# Allegro board 2019-09-10-3.brd
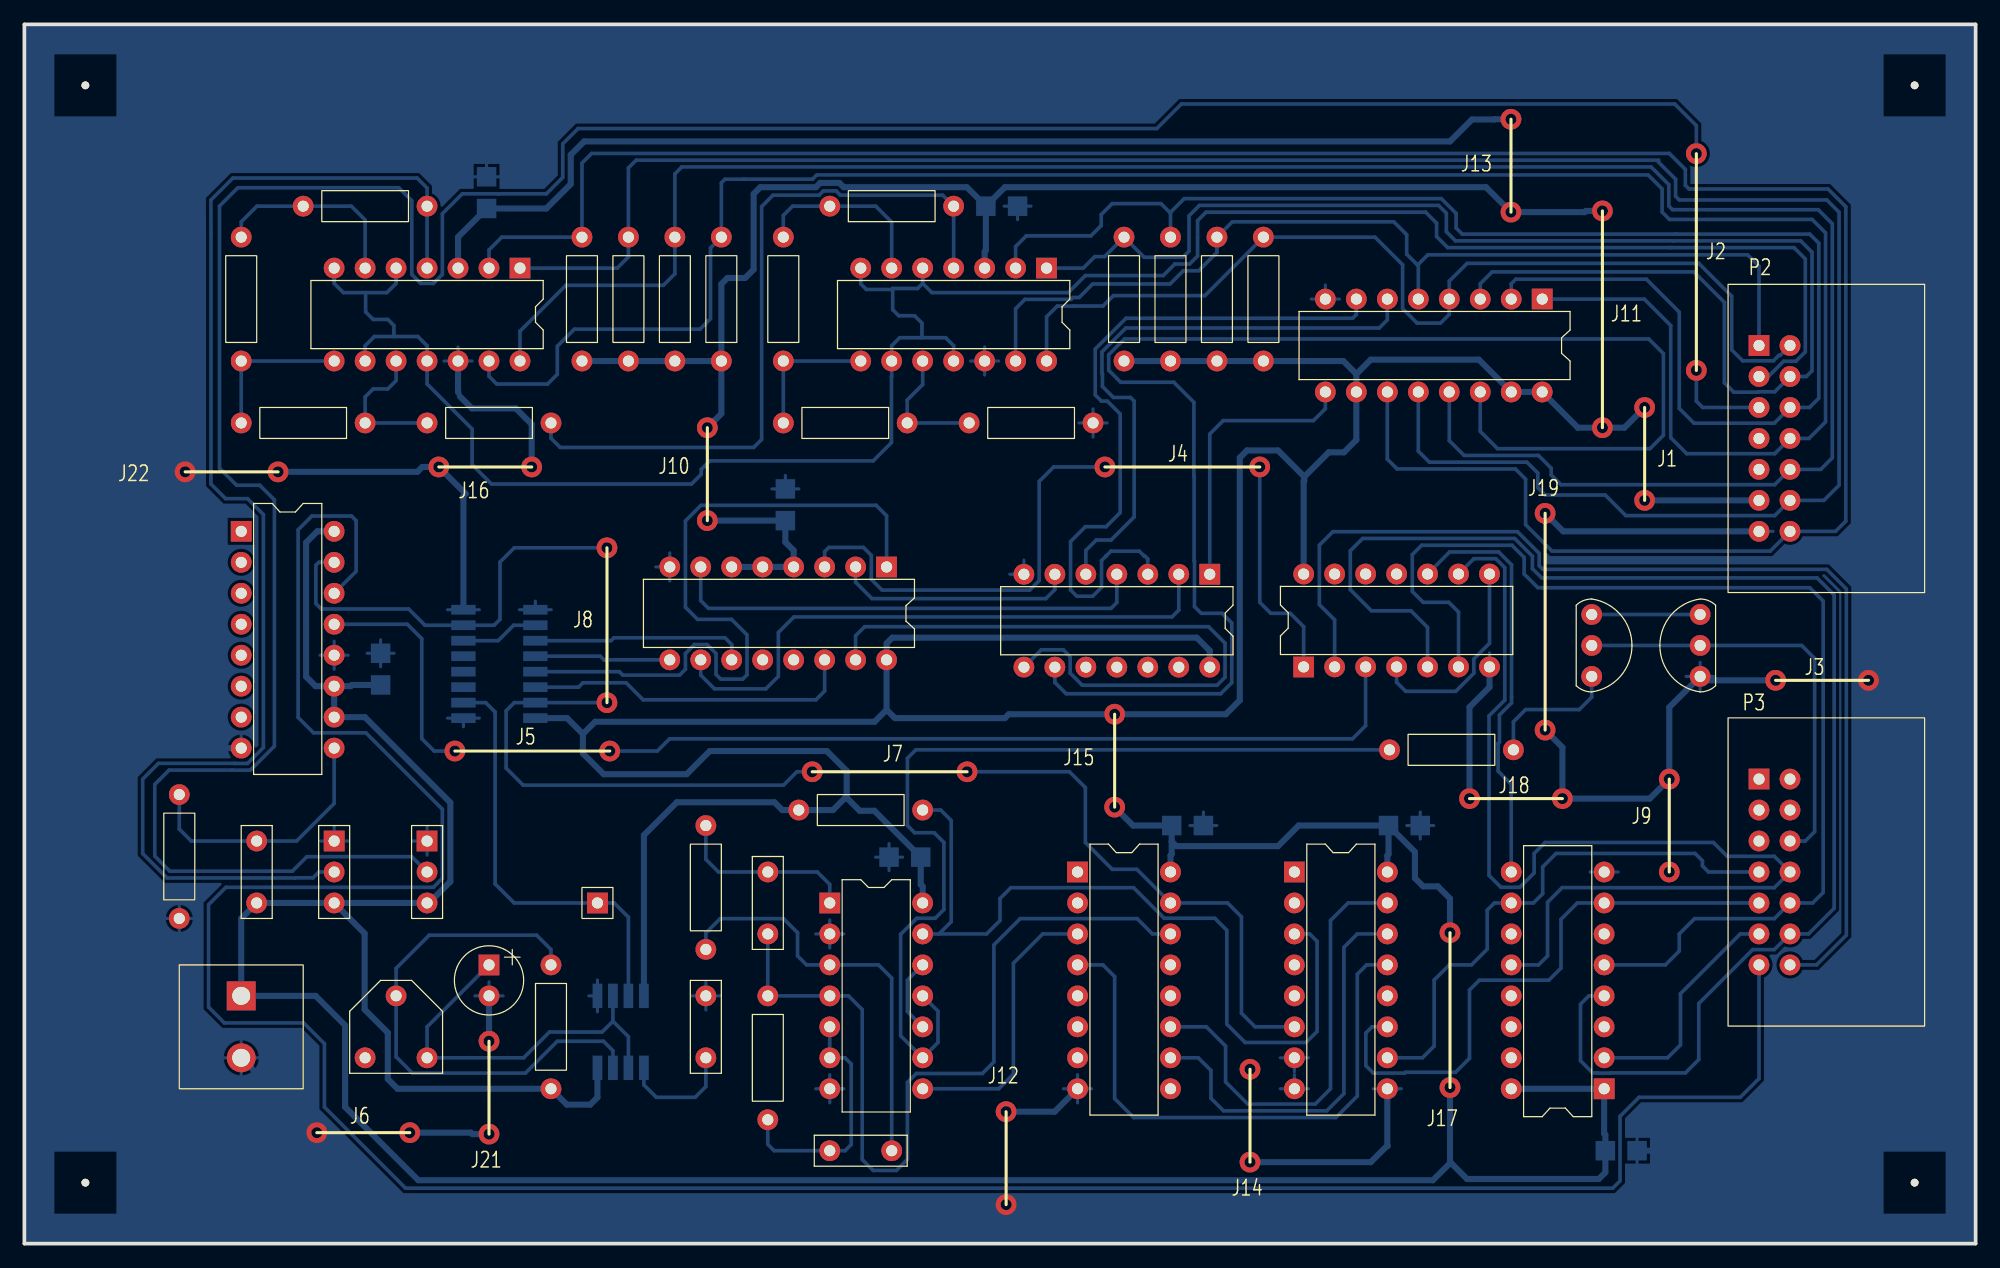
[diagram p0: board, top side]
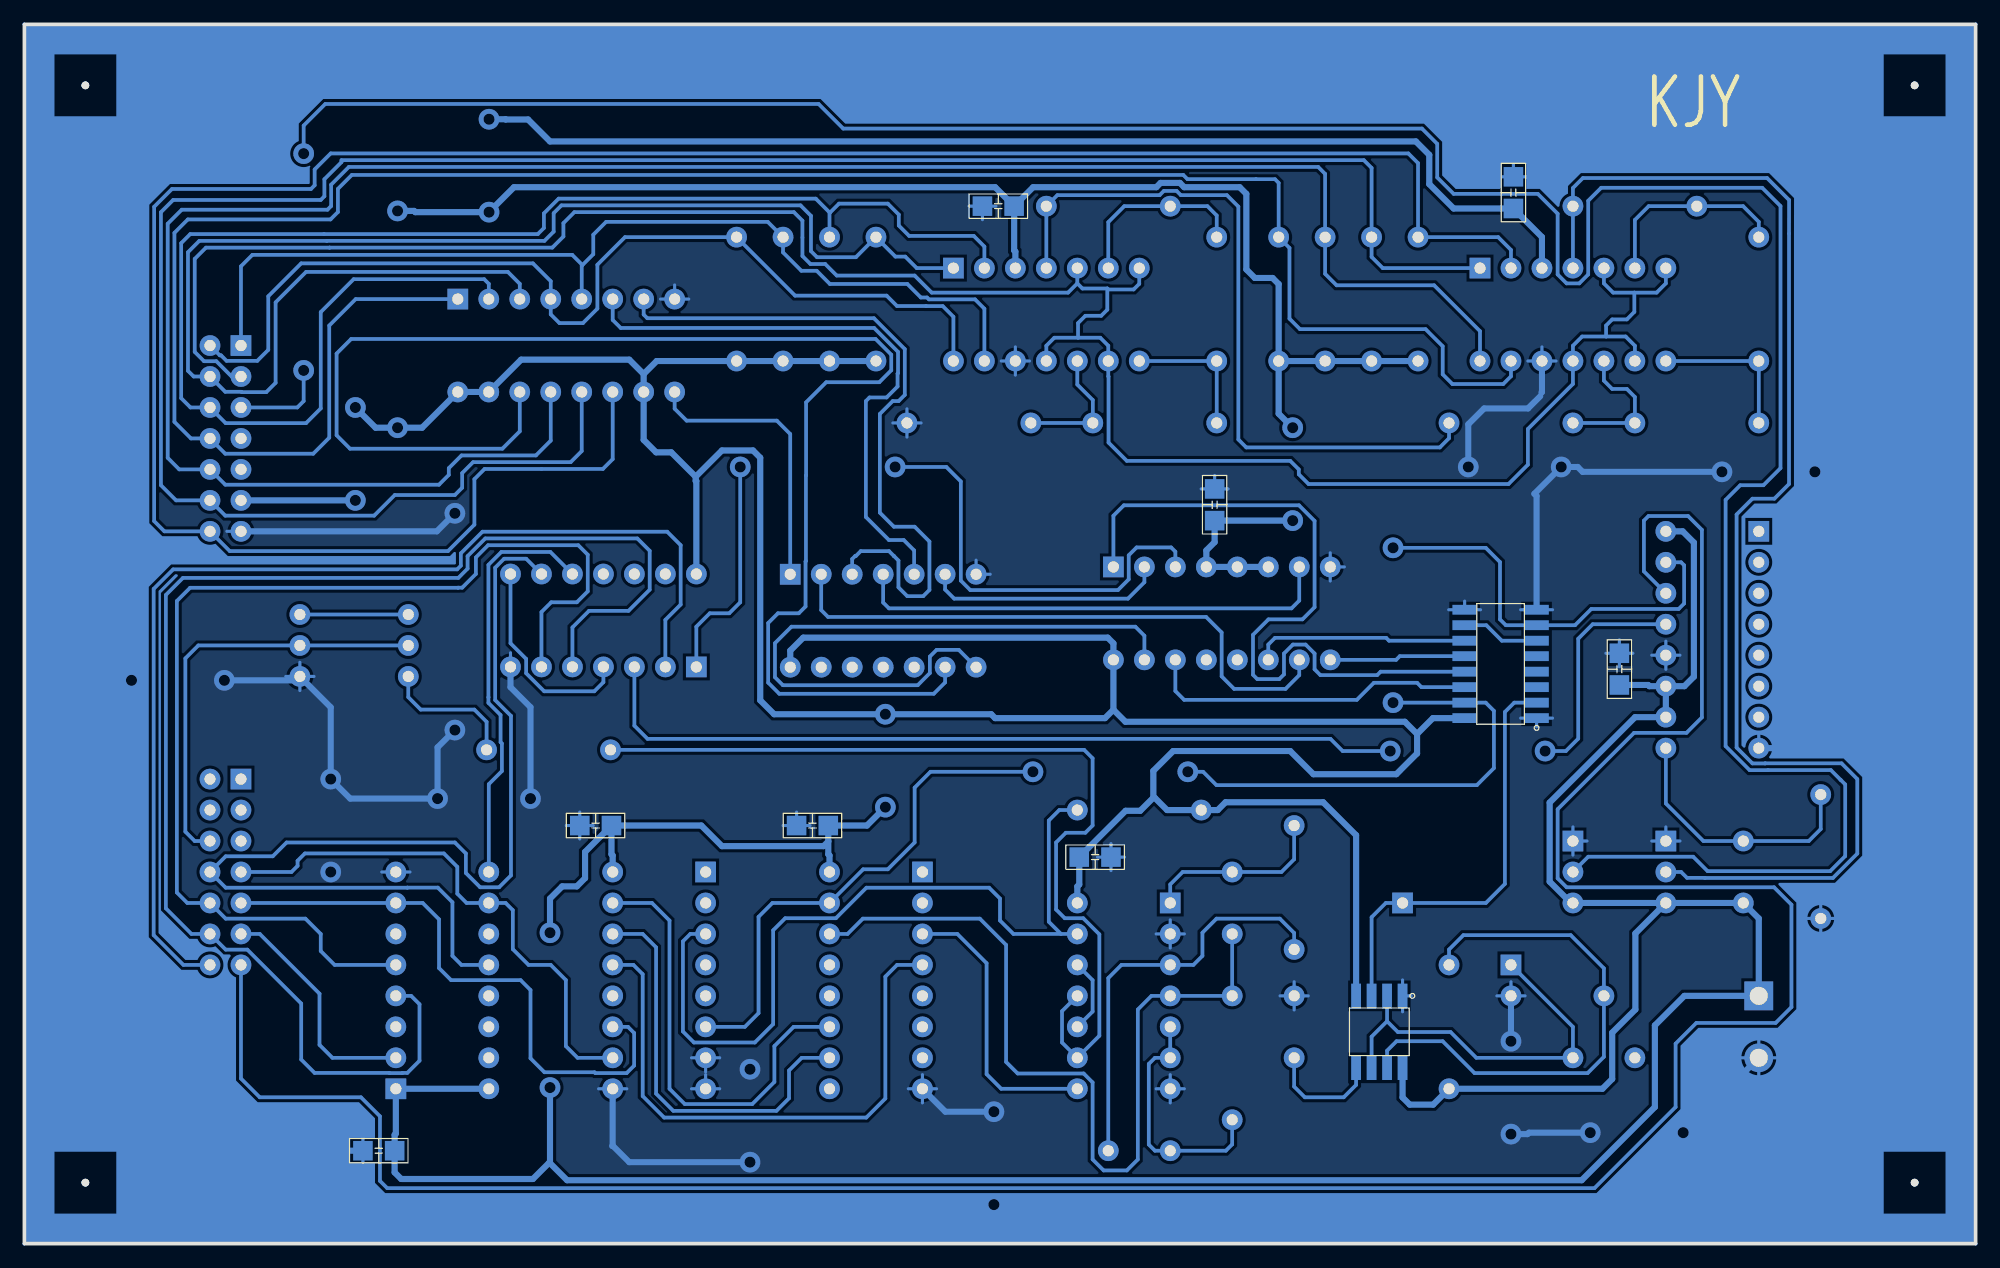
[diagram p1: board, bottom side, seen from below]

Outline 160 x 100 mm; copper layers: TOP, BOTTOM. Coordinates in mm from the lower left corner of the outline.
Outline path: 0,100 0,0 160,0 160,100 0,100

## Design rules (mm)
nets with their own width: min track width 0.5; nets +5V GND

## Placement (name value [footprint] x y rotation side)
C1  10uF  [CAP196]  38.1 22.86 0 top
C2  0.1uF  [CAP300]  55.88 15.24 90 top
C3  0.1uF  [CAP300]  19.05 27.94 90 top
C4  0.01uF  [CAP300]  60.96 30.48 270 top
C5  0.01uF  [CAP300]  71.12 7.62 180 top
C6  0.1uF  [SMDCAP]  37.9 84.8 90 bottom
C7  0.1uF  [SMDCAP]  78.74 85.09 0 bottom
C8  0.1uF  [SMDCAP]  62.4 59.2 90 bottom
C9  0.1uF  [SMDCAP]  111.76 34.29 0 bottom
C10  0.1uF  [SMDCAP]  93.98 34.29 0 bottom
C11  0.1uF  [SMDCAP]  29.21 45.72 90 bottom
C12  0.1uF  [SMDCAP]  129.54 7.62 0 bottom
C13  0.1uF  [SMDCAP]  73.6 31.7 180 bottom
J1  -  [JUMPER2]  132.86 60.96 270 bottom
J2  -  [JUMPER6]  137.1 89.4 90 bottom
J3  -  [JUMPER2]  143.6 46.2 180 bottom
J4  -  [JUMPER4]  88.6 63.7 180 bottom
J5  -  [JUMPER4]  48 40.4 0 bottom
J6  -  [JUMPER2]  31.6 9.1 0 bottom
J7  -  [JUMPER4]  77.3 38.7 0 bottom
J8  -  [JUMPER4]  47.77 44.37 270 bottom
J9  -  [JUMPER2]  134.88 30.48 270 bottom
J10  -  [JUMPER2]  56 59.3 270 bottom
J11  -  [JUMPER6]  129.4 84.7 90 bottom
J12  -  [JUMPER2]  80.5 3.2 270 bottom
J13  -  [JUMPER2]  121.9 84.6 270 bottom
J14  -  [JUMPER2]  100.5 14.3 90 bottom
J15  -  [JUMPER2]  89.4 35.8 270 bottom
J16  -  [JUMPER2]  41.6 63.7 0 bottom
J17  -  [JUMPER4]  116.9 25.5 90 bottom
J18  -  [JUMPER2]  118.5 36.5 180 bottom
J19  -  [JUMPER6]  124.7 59.9 90 bottom
J21  -  [JUMPER2]  38.1 16.6 90 bottom
J22  -  [JUMPER2]  20.8 63.3 0 bottom
NOREF  -  [unnamed]  155 95 0 top
NOREF#2  -  [unnamed]  5 5 0 top
NOREF#3  -  [unnamed]  155 5 0 top
NOREF#4  -  [unnamed]  5 95 0 top
NOREF#5  -  [#2]  0 0 0 top
NOREF#6  -  [#2]  0 0 90 top
P1  CON2  [POWER2]  17.78 20.32 270 top
P2  CON14  [JUMPER14]  142.24 73.66 270 top
P3  CON14  [JUMPER14]  142.24 38.1 270 top
Q1  2SC1815  [TO92]  128.52 51.6 270 top
Q2  2SC1815  [TO92]  137.41 46.52 90 top
R1  10K  [RES400]  43.18 12.7 0 top
R2  10K  [RES400]  33.02 85.09 90 top
R3  10K  [RES400]  17.78 82.55 180 top
R4  10K  [RES400]  17.78 67.31 270 top
R5  10K  [RES400]  33.02 67.31 270 top
R6  10K  [RES400]  76.2 85.09 90 top
R7  10K  [RES400]  62.23 82.55 180 top
R8  10K  [RES400]  62.23 67.31 270 top
R9  100  [RES400]  77.47 67.31 270 top
R10  4.7K  [RES400]  45.72 72.39 0 top
R11  4.7K  [RES400]  49.53 72.39 0 top
R12  4.7K  [RES400]  53.34 72.39 0 top
R13  4.7K  [RES400]  57.15 72.39 0 top
R14  4.7K  [RES400]  93.98 72.39 0 top
R15  4.7K  [RES400]  90.17 72.39 0 top
R16  4.7K  [RES400]  101.6 72.39 0 top
R17  4.7K  [RES400]  97.79 72.39 0 top
R18  680K  [RES400]  12.7 36.83 180 top
R19  10K  [RES400]  55.88 34.29 180 top
R20  10K  [RES400]  60.96 20.32 180 top
R21  10K  [RES400]  63.5 35.56 270 top
R22  1K  [RES400]  122.1 40.5 90 top
TP1  TP  [JUMPER1]  46.99 27.94 0 top
U1  NE555  [SOP8]  46.99 20.32 270 bottom
U2  LM339  [DIP14_3]  40.64 80.01 270 top
U3  LM339  [DIP14_3]  83.82 80.01 270 top
U4  40147  [DIP16_3]  124.46 77.47 270 top
U5  4069  [DIP14_3]  97.2 54.9 270 top
U6  4518  [SOP16]  36 43.1 0 bottom
U7  4585  [DIP16_3]  70.7 55.5 270 top
U8  4027  [DIP16_3]  17.78 58.42 0 top
U9  4071  [DIP14_3]  104.9 47.3 90 top
U10  4001  [DIP14_3]  66.04 27.94 0 top
U11  4017  [DIP16_3]  86.36 30.48 0 top
U12  4051  [DIP16_3]  104.14 30.48 0 top
U13  4175  [DIP16_3]  129.54 12.7 180 top
VR1  1M  [RESADJ]  33.02 15.24 270 top
VR2  10K  [JUMPER3]  25.4 33.02 270 top
VR3  10K  [JUMPER3]  33.02 33.02 270 top

## Library data of the parts
C1 = Cap Pol
C2-C5 = Cap NP: Tolerance: ***; User Part Number: ***
C6-C13 = Cap TEXT
J1-J19 J21 J22 = JUMPER
P1 = CON2
P2 P3 = CON14: User Part Number: ***
Q1 Q2 = 2SC1815
R1-R22 = resistor: Tolerance: ***; User Part Number: ***
TP1 = TP: User Part Number: ***
U1 = NE555
U2 U3 = LM339: Tolerance: ***; User Part Number: ***
U4 = 40147: Tolerance: ***; User Part Number: ***
U5 = 4069: Tolerance: ***; User Part Number: ***
U6 = 4518
U7 = 4585: Tolerance: ***; User Part Number: ***
U8 = 4027: Tolerance: ***; User Part Number: ***
U9 = 4071: Tolerance: ***; User Part Number: ***
U10 = 4001: Tolerance: ***; User Part Number: ***
U11 = 4017: Tolerance: ***; User Part Number: ***
U12 = 4051: Tolerance: ***; User Part Number: ***
U13 = 4175: Tolerance: ***; User Part Number: ***
VR1 = VR1: Tolerance: ***; User Part Number: ***
VR2 VR3 = VR2: User Part Number: ***

## Footprints (pads in the part's own frame, mm; a bottom-side part is the same pattern mirrored in y, then rotated)
CAP196
  rect 1.7x1.7 hole 0.914: 1(0,0)
  round 1.7 hole 0.91: 2(0,-2.54)
CAP300
  round 1.7 hole 0.91: 1(0,0) 2(5.08,0)
DIP14_3
  rect 1.7x1.7 hole 0.914: 1(0,0)
  round 1.7 hole 0.91: 2(0,-2.54) 3(0,-5.08) 4(0,-7.62) 5(0,-10.16) 6(0,-12.7) 7(0,-15.24) 8(7.62,-15.24) 9(7.62,-12.7) 10(7.62,-10.16) 11(7.62,-7.62) 12(7.62,-5.08) 13(7.62,-2.54) 14(7.62,0)
DIP16_3
  rect 1.7x1.7 hole 0.914: 1(0,0)
  round 1.7 hole 0.91: 2(0,-2.54) 3(0,-5.08) 4(0,-7.62) 5(0,-10.16) 6(0,-12.7) 7(0,-15.24) 8(0,-17.78) 9(7.62,-17.78) 10(7.62,-15.24) 11(7.62,-12.7) 12(7.62,-10.16) 13(7.62,-7.62) 14(7.62,-5.08) 15(7.62,-2.54) 16(7.62,0)
JUMPER1
  rect 1.7x1.7 hole 0.914: 1(0,0)
JUMPER3
  rect 1.7x1.7 hole 0.914: 1(0,0)
  round 1.7 hole 0.91: 2(2.54,0) 3(5.08,0)
JUMPER14
  rect 1.7x1.7 hole 0.914: 1(0,0)
  round 1.7 hole 0.91: 2(0,2.54) 3(2.54,0) 4(2.54,2.54) 5(5.08,0) 6(5.08,2.54) 7(7.62,0) 8(7.62,2.54) 9(10.16,0) 10(10.16,2.54) 11(12.7,0) 12(12.7,2.54) 13(15.24,0) 14(15.24,2.54)
POWER2
  rect 2.362x2.362 hole 1.473: 1(0,0)
  round 2.362 hole 1.473: 2(5.08,0)
RES400
  round 1.7 hole 0.91: 1(0,0) 2(0,10.16)
RESADJ
  round 1.7 hole 0.91: 1(0,0) 2(-5.08,-2.54) 3(0,-5.08)
SMDCAP
  rect 1.6x1.6 smd: 1(0.1,0) 2(2.7,0)
SOP8
  rect 2x0.8 smd: 1(0,0) 2(0,-1.27) 3(0,-2.54) 4(0,-3.81) 5(5.9,-3.81) 6(5.9,-2.54) 7(5.9,-1.27) 8(5.9,0)
SOP16
  rect 2x0.8 smd: 1(0,0) 2(0,-1.27) 3(0,-2.54) 4(0,-3.81) 5(0,-5.08) 6(0,-6.35) 7(0,-7.62) 8(0,-8.89) 9(5.9,-8.89) 10(5.9,-7.62) 11(5.9,-6.35) 12(5.9,-5.08) 13(5.9,-3.81) 14(5.9,-2.54) 15(5.9,-1.27) 16(5.9,0)
TO92
  round 1.7 hole 0.91: 1(0,0) 2(2.54,0) 3(5.08,0)
unnamed
  round 0.635 hole 3.175 unplated: (0,0)

## Nets
+5V: C3.1 C6.1 C7.1 C8.1 C9.1 C10.1 C11.1 C12.1 C13.1 P1.1 P2.11 R1.1 R10.1 R11.1 R12.1 R13.1 R14.1 R15.1 R16.1 R17.1 R21.1 U1.4(RST) U1.8(VCC) U2.3 U3.3 U4.10(I\9\) U4.15(I\0\) U4.16(VCC) U5.14 U6.16 U7.4(A>BIN) U7.5(A<BIN) U7.6(A=BIN) U7.16(VCC) U8.10(J) U8.11(K) U8.16 U9.14 U10.14 U11.16(VCC) U12.16(VCC) U13.1(R\S\T\) U13.16(VCC) VR2.3(A) VR3.3(A)
GND: C1.2 C2.2 C6.2 C7.2 C8.2 C9.2 C10.2 C11.2 C12.2 C13.2 P1.2 P2.13 Q2.1(B) R9.2 R18.2 U1.1(GND) U2.12 U3.12 U4.8(GND) U5.7 U6.1(CLK) U6.8 U6.9(CLK) U7.8(GND) U8.8 U8.12(RST) U9.7 U10.2(I1) U10.7 U11.8(GND) U12.7(VEE) U12.8(GND) U12.9(C) U13.8(GND) VR2.1(WIPER) VR3.1(WIPER)
AD0: P2.14 R10.2 U2.2(OUT) U4.11(I\1\)
AD1: P2.12 R11.2 U2.1(OUT) U4.12(I\2\)
AD2: P2.10 R12.2 U2.14(OUT) U4.13(I\3\)
AD3: P2.8 R13.2 U2.13(OUT) U4.1(I\4\)
AD4: P2.6 R14.2 U3.2(OUT) U4.2(I\5\)
AD5: P2.4 R15.2 U3.1(OUT) U4.3(I\6\)
AD6: P2.2 R16.2 U3.14(OUT) U4.4(I\7\)
AD7: P2.1 R17.2 U3.13(OUT) U4.5(I\8\)
CLK: TP1.1 U1.3(OUT) U6.2(EN)
MOTOR-GND: P3.6 Q1.2(C) Q2.2(C)
MR: U6.7(CLR) U6.15(CLR) U8.15(Q) U11.15(RST) U12.6(E\N\)
MR2: P3.13 U8.14(Q\)
SW1: P3.14 U9.2(I1)
SW2: P3.12 U9.5(I0) U13.4(D0)
SW3: P3.10 U9.6(I1) U13.5(D1)
SW4: P3.8 U9.9(I1) U13.12(D2)
SWLED1: P3.11 U13.2(Q0)
SWLED2: P3.9 U12.11(A) U13.7(Q1)
SWLED3: P3.7 U12.10(B) U13.10(Q2)
VR3: P2.5 VR3.2(B)
VR-LED: P2.3 U2.5(+IN) U2.7(+IN) U2.9(+IN) U2.11(+IN) U3.5(+IN) U3.7(+IN) U3.9(+IN) U3.11(+IN)
N01960: R2.2 R3.1 U2.6(-IN)
N01964: R2.1 U2.4(-IN) VR2.2(B)
N02001: R3.2 R4.1 U2.8(-IN)
N02088: R4.2 R5.1 U2.10(-IN)
N02162: R5.2 R6.1 U3.4(-IN)
N02236: R6.2 R7.1 U3.6(-IN)
N02310: R7.2 R8.1 U3.8(-IN)
N02384: R8.2 R9.1 U3.10(-IN)
N03342: U4.9(A\) U5.1(I)
N03346: U4.7(B\) U5.3(I)
N03353: U4.6(C\) U5.5(I)
N03365: U4.14(D\) U5.9(I)
N03377: U5.8(O) U7.15(A3)
N03391: U5.6(O) U7.2(A2)
N03403: U5.4(O) U7.7(A1)
N03415: U5.2(O) U7.10(A0)
N03439: U6.11(Q0) U7.11(B0)
N03441: U6.12(Q1) U7.9(B1)
N03443: U6.13(Q2) U7.1(B2)
N03445: U6.14(Q3) U7.14(B3)
N03459: U6.6(Q3) U6.10(EN)
N03623: R1.2 U1.7(DISC) VR1.2
N03677: C1.1 U1.2(TRIG) U1.6(THR) VR1.1
N03742: C2.1 U1.5(CV)
N03797: U7.3(A=BOUT) U9.1(I0)
N03822: U8.13(CLK) U9.3(O)
N03853: C3.2 R18.1 U8.9(SET)
N08438: C4.1 R19.1 U10.1(I0)
N08457: C4.2 R20.1 U10.4(O) U11.14(CLK)
N08473: C5.2 R20.2 U10.5(I0) U10.6(I1)
N08528: C5.1 R19.2 U10.3(O)
N08724: U11.11(9) U12.15(X2)
N08757: U11.10(4) U12.14(X1)
N08772: U11.4(2) U12.13(X0)
N08784: U10.8(I0) U11.3(0)
N08808: R21.2 U10.13(I1) U12.3(X)
N08837: U9.4(O) U9.8(I0)
N08841: U9.10(O) U13.9(CLK)
N09092: U10.10(O) U10.12(I0)
N09117: R22.2 U10.9(I1) U10.11(O)
N09203: Q1.3(E) R22.1
N09219: Q1.1(B) Q2.3(E)

Pads without a net: P2 7 9; P3 1 2 3 4 5; U5 10 11 12 13; U6 3 4 5; U7 12 13; U8 1 2 3 4 5 6 7; U9 11 12 13; U11 1 2 5 6 7 9 12 13; U12 1 2 4 5 12; U13 3 6 11 13 14 15; VR1 3

## Via types
v1: diameter 1.7, hole 0.91, TOP to BOTTOM, 42 vias

## Routing (per net, layer and track width the routed paths; a pad name or vN(x,y) marks a point on that pad's centre or on a via; arc(x,y) is an arc through that point)
+5V: length 777.4
  BOTTOM w0.5: R13.1 57.15,78.7 57.65,79.2 59.1,79.2 59.8,79.9 59.8,86.1 60.35,86.65 64.9,86.65 65.25,87 66.83,87 67.18,86.65 77.28,86.65 C7.1 ; R13.1 R12.1 R11.1 R10.1 ; R13.1 57.15,68.07 v1(56,66.92) ; C7.1 78.84,81.46 78.74,81.36 U3.3 ; C7.1 80.4,86.65 119.85,86.65 v1(121.9,84.6) 127.95,84.6 128.05,84.7 v1(129.4,84.7) ; 104.95,62.9 104.95,62.55 104.9,62.55 U9.14 ; 104.95,62.9 106.95,64.9 108.2,64.9 109.22,65.92 U4.10 109.22,71.32 ; 104.95,62.9 102.8,65.05 100.25,65.05 99.66,64.46 99.66,44.56 98.52,43.42 v1(89.4,43.42) 80.72,43.42 80.4,43.1 71.39,43.1 70.7,43.79 ; C9.1 104.49,34.29 102.8,32.6 94.47,32.6 94.08,32.99 ; C9.1 111.86,31.93 111.76,31.83 U12.16 ; C9.1 114.03,32.12 114.03,29.98 114.7,29.3 115.9,29.3 116.9,28.3 v1(116.9,25.5) ; U8.11 23.88,45.72 23.1,46.5 23.1,57.5 24.02,58.42 U8.16 ; U8.11 26.75,45.72 26.85,45.82 C11.1 ; U8.11 U8.10 27.92,43.18 34.93,36.17 34.93,29.69 33.18,27.94 VR3.3 VR2.3 ; 70.7,43.79 U7.16 70.7,49.23 71.17,49.7 96.13,49.7 97.2,48.63 U5.14 ; 70.7,43.79 69.71,42.8 46.8,42.8 45.8,41.8 ; 94.08,32.99 94.08,31.93 93.98,31.83 U11.16 ; 94.08,32.99 C10.1 90.91,34.29 v1(89.4,35.8) ; 116.9,6.6 115.5,5.2 32.3,5.2 26.3,11.2 26.3,17.9 23.88,20.32 P1.1 17.78,26.67 C3.1 VR2.3 ; 116.9,6.6 v1(116.9,12.8) ; 116.9,6.6 117,6.6 118.3,5.3 129.1,5.3 129.64,5.84 C12.1 129.64,8.92 129.54,9.02 U13.1 U13.16 ; U1.4 50.8,33.5 53.5,36.2 61.51,36.2 62.15,35.56 R21.1 66.3,35.56 67.31,36.57 67.43,36.57 ; U10.14 73.66,29.29 73.5,29.45 C13.1 69.7,35.5 68.5,35.5 67.43,36.57 ; v1(121.9,92.22) 120.55,92.22 120.53,92.2 118.7,92.2 116.9,90.4 45.9,90.4 44.8,89.3 44.8,86.9 42.8,84.9 C6.1 35.56,82.56 U2.3 ; U7.6 U7.5 U7.4 63.08,56.85 62.4,57.53 C8.1 v1(56,59.3) ; 109.22,71.32 110.4,72.5 119.27,72.5 U4.15 U4.16 127.39,66.92 v1(129.4,66.92) 131.2,66.92 v1(132.86,68.58) ; 109.22,71.32 108.15,72.39 R16.1 R17.1 R14.1 R15.1 ; 45.8,41.8 44.5,43.1 U6.16 ; 45.8,41.8 45.8,40.2 47.5,38.5 54.3,38.5 56.2,40.4 65.8,40.4 67.43,38.77 67.43,36.57 ; VR2.3 27.9,25.44 27.9,19.2 29.8,17.3 29.8,13.5 30.6,12.7 R1.1 44.48,11.4 46.4,11.4 46.99,11.99 U1.8 ; P2.11 v1(132.86,60.96)
GND: length 407.5
  BOTTOM w0.254: U3.12 78.74,73.55 ; U3.12 78.74,71.23 ; U3.12 77.58,72.39 ; U3.12 79.9,72.39 ; 86.36,11.54 U11.8 ; U11.8 87.52,12.7 ; U11.8 85.2,12.7 ; U11.8 86.36,13.86 ; 12.7,25.51 R18.2 ; R18.2 11.54,26.67 ; R18.2 12.7,27.83 ; R18.2 13.86,26.67 ; C9.2 115.57,34.29 ; C9.2 113.35,34.29 ; C9.2 114.46,35.4 ; C9.2 114.46,33.18 ; U2.12 35.56,73.55 ; U2.12 36.72,72.39 ; U2.12 34.4,72.39 ; C11.2 29.21,49.53 ; C11.2 29.21,47.31 ; C11.2 30.32,48.42 ; C11.2 28.1,48.42 ; 66.04,24.24 U10.2 ; U10.2 66.04,26.56 ; U10.2 67.2,25.4 ; U10.2 64.88,25.4 ; 46.28,20.32 U1.1 ; U1.1 46.99,19.01 ; U1.1 46.99,21.63 ; 105.52,77.47 U4.8 ; U4.8 107.84,77.47 ; U4.8 106.68,78.63 ; 80.33,85.09 C7.2 ; C7.2 82.55,85.09 ; C7.2 81.44,83.98 ; 40.59,51.99 U6.9 ; U6.9 41.9,52.7 ; U6.9 43.21,51.99 ; C8.2 62.4,63.01 ; C8.2 63.51,61.9 ; C8.2 61.29,61.9 ; R9.2 87.63,68.47 ; R9.2 88.79,67.31 ; R9.2 86.47,67.31 ; R9.2 87.63,66.15 ; C10.2 96.68,35.4 ; C10.2 95.57,34.29 ; C10.2 97.79,34.29 ; 24.24,33.02 VR2.1 ; VR2.1 26.56,33.02 ; VR2.1 25.4,34.18 ; 24.24,48.26 U8.12 ; U8.12 25.4,49.42 ; U8.12 26.56,48.26 ; U8.12 25.4,47.1 ; 34.69,51.99 U6.8 37.31,51.99 ; 33.02,31.86 VR3.1 ; VR3.1 31.86,33.02 ; VR3.1 33.02,34.18 ; C2.2 57.04,20.32 ; C2.2 54.72,20.32 ; C2.2 55.88,19.16 ; C2.2 55.88,21.48 ; 132.24,6.51 C12.2 132.24,8.73 ; 36.94,20.32 C1.2 ; C1.2 38.1,21.48 ; C1.2 39.26,20.32 ; 102.98,12.7 U12.8 ; U12.8 104.14,13.86 ; U12.8 105.3,12.7 ; 34.69,43.1 U6.1 ; U6.1 36,42.39 ; U6.1 37.31,43.1 ; P1.2 19.27,15.24 ; P1.2 16.29,15.24 ; P1.2 17.78,13.75 ; P1.2 17.78,16.73 ; 104.14,14.08 U12.7 ; U12.7 102.98,15.24 ; U12.7 105.3,15.24 ; 112.92,12.7 U12.9 110.6,12.7 ; U10.7 67.2,12.7 ; U10.7 66.04,11.54 ; U10.7 66.04,13.86 ; U10.7 64.88,12.7 ; U9.7 120.14,48.46 ; C13.2 70.9,32.81 ; C13.2 69.79,31.7 ; C13.2 72.01,31.7 ; C13.2 70.9,30.59 ; U7.8 52.92,56.66 ; U7.8 51.76,55.5 ; U7.8 52.92,54.34 ; 80.8,54.9 U5.7 81.96,56.06 ; U8.8 17.78,41.8 ; 137.41,45.36 Q2.1 ; Q2.1 136.25,46.52 ; Q2.1 137.41,47.68 ; Q2.1 138.57,46.52 ; 128.38,30.48 U13.8 130.7,30.48 ; 36.79,87.5 C6.2 ; C6.2 39.01,87.5 ; C6.2 37.9,88.61 ; P2.13 143.4,58.42
  BOTTOM w0.5: v1(41.6,63.7) 41.6,67.2 40.3,68.5 36.7,68.5 35.7,69.5 ; U12.9 111.76,8.04 ; 111.76,8.04 111.8,8 ; 111.76,8.04 110.4,6.68 v1(100.5,6.68) ; v1(20.8,63.3) 32.23,63.3 32.63,63.7 v1(33.98,63.7) 36.18,61.5 36,61.32 U6.8 ; U11.8 84.48,10.82 v1(80.5,10.82) ; P1.2 22.96,10.06 23.02,10.06 v1(23.98,9.1) 29.88,3.2 v1(80.5,3.2) ; U8.8 14.96,40.64 13.18,42.42 v1(13.18,63.3) ; U2.12 35.56,69.84 35.6,69.8 ; v1(118.5,36.5) 118.5,44 120.14,45.64 U9.7 ; v1(38.1,8.98) 36.75,8.98 36.63,9.1 v1(31.6,9.1) ; v1(124.7,42.12) 126.12,40.7 v1(126.12,36.5) 133.28,36.5 v1(134.88,38.1) 134.88,43.99 Q2.1 137.73,46.2 v1(143.6,46.2) ; v1(151.22,46.2) 151.22,15.52 143.32,7.62 C12.2 ; C1.2 v1(38.1,16.6) ; P2.13 126.18,58.42 v1(124.7,59.9)
  vias: v1(100.5,14.3) v1(134.88,30.48)
AD0: length 197.4
  BOTTOM w0.3: U4.11 111.76,64.34 112.56,63.54 117.59,63.54 122.26,63.54 123.1,62.7 123.1,58.97 125.27,56.8 143.16,56.8 P2.14 148.52,58.42 149.36,59.26 149.36,85.04 147.9,86.5 136.5,86.5 136.2,86.8 136.2,88.1 134.88,89.42 46.52,89.42 45.72,88.62 R10.2 39.15,82.55 38.1,81.5 U2.2
AD1: length 184.5
  BOTTOM w0.3: U2.1 48.61,80.01 49.53,80.93 R11.2 49.53,88.23 50.16,88.86 134,88.86 134,88.7 135.4,87.3 135.4,85.9 135.7,85.6 147.8,85.6 148.8,84.59 148.8,62.2 147.56,60.96 P2.12 143.53,59.71 131.32,59.71 129.63,61.4 124.7,61.4 124.1,62 124.1,63.2 123.21,64.09 115.21,64.09 114.3,65 U4.12
AD2: length 180.7
  BOTTOM w0.3: U4.13 116.84,65.86 118.05,64.65 124.15,64.65 125.2,63.6 125.2,63.05 126,62.25 143.53,62.25 P2.10 147.3,63.5 148.25,64.45 148.25,83.65 147.1,84.8 135.15,84.8 134.85,85.1 134.85,86.85 133.39,88.31 53.91,88.31 53.34,87.74 R12.2 53.34,79.54 52.4,78.6 44.4,78.6 40.64,74.84 U2.14
AD3: length 179.1
  BOTTOM w0.3: U2.13 38.1,71.14 38.74,70.5 42.9,70.5 43.7,71.3 43.7,73.6 45.1,75 55.4,75 56.26,75.86 56.26,81.66 R13.2 57.15,87 57.45,87.3 59,87.3 59,87.3 64.63,87.3 64.97,87.65 133.15,87.65 134.29,86.51 134.29,84.61 134.9,84 146.6,84 147.7,82.9 147.7,67.4 146.34,66.04 P2.8 143.53,64.79 136.31,64.79 135,66.1 135,75.3 132.83,77.47 U4.1
AD4: length 124.3
  BOTTOM w0.3: 93.98,84.58 95.11,85.71 116.19,85.71 117.4,84.5 117.4,83.3 117.9,82.8 135.43,82.8 135.43,82.8 146.4,82.8 147.14,82.06 147.14,69.34 146.38,68.58 P2.6 143.49,67.29 136.91,67.29 135.7,68.5 135.7,76.4 133,79.1 122.3,79.1 121.92,78.72 U4.2 ; 93.98,84.58 R14.2 ; 93.98,84.58 93.92,84.58 93.2,85.3 89.2,85.3 88.3,84.4 88.3,83.5 87.45,82.65 82.15,82.65 81.28,81.78 U3.2
AD5: length 117.7
  BOTTOM w0.3: U3.1 86.83,80.01 87.77,80.95 88.57,80.95 R15.2 91.82,80.9 95,80.9 95.5,81.4 95.5,84.3 96.35,85.15 115.96,85.15 116.6,84.52 116.6,83 117.35,82.25 135.2,82.25 135.2,82.24 145.66,82.24 146.59,81.31 146.59,71.59 146.12,71.12 P2.4 143.53,69.87 142.2,69.87 142.17,69.83 140.17,69.83 139.4,70.6 139.4,77.2 136.9,79.7 120.36,79.7 119.38,78.72 U4.3
AD6: length 82.4
  BOTTOM w0.3: U3.14 83.82,76.02 84.69,76.89 86.06,76.89 86.07,76.9 88.45,76.9 89.3,77.75 96.8,77.75 R16.2 110.75,82.55 113.01,80.29 113.01,76.69 114.2,75.5 116.12,75.5 116.84,76.22 U4.4 116.84,78.94 118.3,80.4 137.3,80.4 140,77.7 140,73.31 140.9,72.41 143.42,72.41 143.87,72.86 143.97,72.86 P2.2
AD7: length 81.4
  BOTTOM w0.3: U3.13 81.28,76.68 82.05,77.45 85.83,77.45 85.98,77.6 86.49,77.6 87.6,78.71 93.95,78.71 95.03,79.79 96.29,79.79 97.79,81.3 R17.2 99.04,83.8 112.3,83.8 113.35,82.75 113.35,81.15 114.24,80.26 ; 114.24,80.26 115.08,81.1 141.3,81.1 142.24,80.16 P2.1 ; 114.24,80.26 114.3,80.2 U4.5
CLK: length 35.5
  BOTTOM w0.3: U1.3 49.53,26.77 48.36,27.94 TP1.1 40.16,27.94 38.6,29.5 38.6,43.6 37.83,44.37 U6.2
MOTOR-GND: length 35.3
  BOTTOM w0.3: Q1.2 Q2.2 145.74,49.06 146.8,48 146.8,33.79 146.03,33.02 P3.6
MR: length 116.9
  BOTTOM w0.3: U8.15 24.15,55.88 23.9,55.63 23.9,52.5 24.35,52.05 31.51,52.05 32.85,50.72 U6.7 38.52,50.72 39,51.2 39,55.9 40.17,57.07 v1(47.77,57.07) ; v1(64.6,38.7) 63.35,38.7 62.25,37.6 40.9,37.6 39.5,39 39.5,43.7 40.17,44.37 U6.15 v1(47.77,44.37) ; U12.6 100.92,17.78 99.8,18.9 99.8,26.8 98.66,27.94 U11.15 91.22,30.7 89.2,30.7 87,32.9 87,37.4 85.7,38.7 v1(77.3,38.7)
MR2: length 229
  BOTTOM w0.3: U8.14 27.2,55.14 27.2,59.3 26.83,59.67 23.57,59.67 22.45,58.55 22.45,43.15 23.71,41.89 28.01,41.89 34.27,35.63 34.27,29.96 33.54,29.23 16.53,29.23 15.1,27.8 15.1,19.4 16.4,18.1 22.9,18.1 24.6,16.4 24.6,11.2 31.25,4.55 130.25,4.55 130.84,5.14 130.84,10.44 132.4,12 140.7,12 142.24,13.54 P3.13
SW1: length 90.7
  BOTTOM w0.3: U9.2 107.44,51.16 106.19,52.41 106.19,57.29 107.29,58.39 122.44,58.39 124.21,56.61 124.21,55.6 124.51,55.3 147.8,55.3 149.4,53.7 149.4,25.3 146.96,22.86 P3.14
SW2: length 118.7
  BOTTOM w0.3: U9.5 115.06,50.54 113.7,51.9 110.46,51.9 108.73,53.63 108.73,56.83 109.74,57.84 122.21,57.84 123.66,56.38 123.66,55.36 124.42,54.6 147,54.6 148.4,53.2 148.4,27.5 146.3,25.4 P3.12 143.49,24.11 141.72,24.11 137.3,19.69 137.3,15.1 136.2,14 130.07,14 130.06,13.99 129.02,13.99 129.01,14 128.6,14 127.6,15 127.6,19.63 128.29,20.32 U13.4
SW3: length 93.9
  BOTTOM w0.3: U9.6 117.6,51.8 116.8,52.6 114.7,52.6 113.81,53.49 113.81,56.51 114.58,57.28 121.98,57.28 122.98,56.28 122.98,54.92 124.1,53.8 124.43,53.8 124.44,53.79 146.41,53.79 147.5,52.7 147.5,28.8 146.64,27.94 P3.10 143.49,26.65 136.95,26.65 135.7,25.4 135.7,24 134.56,22.86 U13.5
SW4: length 87.5
  BOTTOM w0.3: U13.12 124.16,22.86 124.9,23.6 124.9,28 126.1,29.2 128.59,29.2 128.6,29.19 143.49,29.19 P3.8 143.49,31.77 139.63,31.77 138.5,32.9 124.7,32.9 123.8,32 123.8,30.4 122.63,29.23 121.07,29.23 120.1,30.2 120.1,43.28 121.39,44.58 121.39,55.44 120.66,56.17 118.85,56.17 U9.9
SWLED1: length 19.4
  BOTTOM w0.3: P3.11 140.7,25.4 135.8,20.5 135.8,16.3 134.74,15.24 U13.2
SWLED2: length 48.5
  BOTTOM w0.3: U12.11 110.51,17.78 110,17.27 110,14.6 110.61,13.99 113.19,13.99 113.25,14.05 117.35,14.05 118.5,15.2 118.5,20.8 119.31,21.61 125.01,21.61 126,22.6 126,26.6 127.34,27.94 U13.7 P3.9
SWLED3: length 44.6
  BOTTOM w0.3: P3.7 138.1,30.48 137.6,30.98 137.6,31.4 137,32 125.6,32 124.5,30.9 124.5,28.7 123.74,27.94 U13.10 120.54,27.94 119.95,27.35 119.95,24.15 118.66,22.86 116.84,22.86 115.6,21.62 115.6,16.2 114.64,15.24 U12.10
VR3: length 238.2
  BOTTOM w0.3: VR3.2 31.77,31.73 23.16,31.73 21.97,30.55 11.93,30.55 10.69,31.78 10.69,37.66 11.07,38.05 11.07,38.05 11.87,38.84 17.02,38.84 17.03,38.83 18.53,38.83 20.5,40.8 20.5,61 19.3,62.2 17.4,62.2 16,63.6 16,85.1 17.5,86.6 30.7,86.6 31.77,85.53 31.77,79.49 32.5,78.76 33.54,78.76 34.27,79.49 34.27,84.47 35.9,86.1 38.87,86.1 38.87,86.1 42.8,86.1 44.15,87.45 44.15,90.2 45.4,91.46 92.86,91.46 94.87,93.47 135.33,93.47 137.1,91.7 v1(137.1,89.4) ; v1(137.1,71.62) 137.1,69.1 137.62,68.58 P2.5
VR-LED: length 188.7
  BOTTOM w0.3: 73.6,74.3 71.78,74.3 71.12,73.64 U3.9 71.12,71.14 71.1,71.12 71.1,65.7 69.6,64.2 56.2,64.2 55.5,63.5 55.5,63.1 54.7,62.3 38.3,62.3 36.71,63.89 36.71,66.81 33.02,70.51 U2.11 33.02,73.64 32.26,74.4 30.3,74.4 ; 73.6,74.3 73.6,75.5 73,76.1 71.7,76.1 71.2,76.6 71.2,78.34 ; 73.6,74.3 75.54,74.3 76.2,73.64 U3.11 ; 71.2,78.34 73.24,78.34 73.66,78.76 ; 71.2,78.34 71.12,78.26 69.04,78.26 68.58,78.72 U3.7 ; 30.3,74.4 28.7,74.4 27.94,73.64 U2.9 ; 30.3,74.4 30.3,75.3 29.8,75.8 28.6,75.8 27.98,76.42 27.98,78 ; U2.5 30.48,78.76 29.72,78 27.98,78 ; 73.66,78.76 U3.5 ; 73.66,78.76 74.42,78 85.6,78 87,79.4 93.39,79.4 94.33,80.35 95.55,80.35 96.2,81 96.2,82.51 96.2,83.9 96.9,84.6 114.9,84.6 115.8,83.7 115.8,82.6 116.71,81.69 134.97,81.69 134.97,81.69 145.11,81.69 146.03,80.77 146.03,73.14 145.27,72.37 144.26,72.37 143.01,71.12 P2.3 ; 27.98,78 26.16,78 25.4,78.76 U2.7
N01960: length 16.4
  BOTTOM w0.3: U2.6 27.94,83.96 26.81,85.09 R2.2 19.07,85.09 17.78,83.8 R3.1
N01964: length 106.9
  BOTTOM w0.3: VR2.2 24.15,30.48 23.67,30 22.21,30 22.2,29.99 11.7,29.99 9.7,31.99 9.7,38.1 10.99,39.39 17.25,39.39 17.26,39.39 18.3,39.39 19.6,40.69 19.6,59.8 18.3,61.1 16.5,61.1 15.3,62.3 15.3,82.84 15.29,85.59 17.1,87.4 32.2,87.4 33.02,86.58 R2.1 U2.4
N02001: length 12.7
  BOTTOM w0.3: U2.8 R3.2 R4.1
N02088: length 11.9
  BOTTOM w0.3: R5.1 R4.2 27.94,69.44 28.6,70.1 29.8,70.1 30.48,70.78 U2.10
N02162: length 60.1
  BOTTOM w0.3: U3.4 R6.1 75.3,85.99 66.91,85.99 66.56,86.34 65.52,86.34 65.17,85.99 61.39,85.99 60.45,85.05 60.45,65.95 59.8,65.3 43.94,65.3 43.18,66.06 R5.2
N02236: length 15.3
  BOTTOM w0.3: R7.1 62.23,84.33 62.99,85.09 R6.2 69.81,85.09 71.12,83.78 U3.6
N02310: length 11.4
  BOTTOM w0.3: U3.8 R7.2 R8.1
N02384: length 10.7
  BOTTOM w0.3: R9.1 R8.2 72.39,69.19 73.66,70.46 U3.10
N03342: length 23.2
  BOTTOM w0.3: U4.9 106.68,68.48 105.7,67.5 98.3,67.5 97.2,66.4 U5.1
N03346: length 58.3
  BOTTOM w0.3: U5.3 92.12,56.15 91.87,56.4 91.82,56.4 91.42,56.8 89.1,56.8 88.7,56.4 88.7,56.4 88.33,56.03 88.33,53.83 87.6,53.1 86.3,53.1 85.79,53.61 85.79,57.59 87,58.8 88.7,58.8 89.85,59.95 89.85,68.05 88.8,69.1 88.32,69.1 87.81,69.61 87.81,73.37 90.34,75.9 108.92,75.9 109.22,76.2 U4.7
N03353: length 48.7
  BOTTOM w0.3: U4.6 111.76,75.76 111.1,75.1 90.32,75.1 88.36,73.14 88.36,71.4 88.4,71.36 88.4,70.3 89.3,69.4 90.7,69.4 91,69.1 91,59.6 89.11,57.71 87.89,57.71 87.04,56.86 U5.5
N03365: length 123.7
  BOTTOM w0.3: U5.9 84.5,46.03 85.43,45.1 98.1,45.1 99.01,46.01 99.01,50.9 98.21,51.7 96.5,51.7 95.95,52.25 95.95,55.95 95.91,55.99 95.91,63 95.9,63.01 95.9,69 94.25,70.65 89.9,70.65 88.92,71.63 88.92,72.91 90.21,74.2 133.2,74.2 134.4,73 134.4,66.3 133.3,65.2 120.8,65.2 119.38,66.62 U4.14
N03377: length 55.3
  BOTTOM w0.3: U5.8 83.38,48.7 85.2,48.7 85.75,48.15 85.75,46.79 86.75,45.8 97.8,45.8 98.45,46.45 98.45,49.25 97.1,50.6 68.9,50.6 68.16,49.86 U7.15
N03391: length 19.7
  BOTTOM w0.3: U5.6 84.5,53.65 83.75,52.9 69.51,52.9 68.16,54.25 U7.2
N03403: length 39.7
  BOTTOM w0.3: U7.7 55.46,52.74 56.1,52.1 89.1,52.1 89.58,52.58 U5.4
N03415: length 48.6
  BOTTOM w0.3: U5.2 94.66,51.96 94.1,51.4 63.1,51.4 61.83,50.13 61.83,46.53 60.8,45.5 56.59,45.5 55.46,46.63 U7.10
N03439: length 17.7
  BOTTOM w0.3: U6.11 48.1,49.45 48.34,49.69 57.45,49.69 58,49.13 U7.11
N03441: length 11.1
  BOTTOM w0.3: U6.12 47.22,48.18 47.52,47.88 U7.9
N03443: length 59.5
  BOTTOM w0.3: U7.1 70.7,59.7 69.85,60.55 55.48,60.55 54.21,59.28 54.21,52.19 55.2,51.2 57.99,51.2 59.25,49.93 59.25,46.65 58.9,46.3 57.1,46.3 56.71,46.69 56.71,48.4 55.98,49.13 54.94,49.13 54.21,48.4 54.21,47.11 53.73,46.63 49.07,46.63 48.79,46.91 U6.13
N03445: length 27.3
  BOTTOM w0.3: U6.14 45.44,45.64 45.8,46 49.34,46 50.74,44.6 64.9,44.6 65.62,45.32 U7.14
N03459: length 6.4
  BOTTOM w0.3: U6.6 38.85,49.45 40.12,50.72 U6.10
N03623: length 44
  BOTTOM w0.3: R1.2 43.18,24.12 42,25.3 33.2,25.3 30.48,22.58 VR1.2 30.48,15.32 31.81,13.99 41.09,13.99 43.7,16.6 47.48,16.6 48.26,15.82 U1.7
N03677: length 32.6
  BOTTOM w0.3: 48.26,18.24 U1.2 ; 48.26,18.24 47.37,17.35 43.05,17.35 40.94,15.24 VR1.1 33.02,17.78 C1.1 ; 48.26,18.24 49.53,16.97 U1.6
N03742: length 9.6
  BOTTOM w0.3: U1.5 50.8,13.02 51.82,12 55,12 55.88,12.88 C2.1
N03797: length 54.8
  BOTTOM w0.3: v1(88.6,63.7) 84.4,63.7 83.21,62.51 83.21,54.38 82.43,53.6 70.33,53.6 69.45,54.48 69.45,56.45 68.8,57.1 65.97,57.1 65.62,56.75 U7.3 ; U9.1 104.9,50.6 103.8,51.7 102.2,51.7 101.3,52.6 v1(101.3,63.7)
N03822: length 86.7
  BOTTOM w0.3: v1(35.3,40.4) 33.6,40.4 32.58,41.42 32.58,49.62 31.4,50.8 U8.13 ; U9.3 109.98,42.48 108.9,41.4 52.9,41.4 51.9,40.4 v1(48,40.4)
N03853: length 21.8
  BOTTOM w0.3: U8.9 25.4,36.1 22.32,33.02 C3.2 13.68,33.02 12.7,34 R18.1
N08438: length 15.3
  BOTTOM w0.3: U10.1 66.04,29.46 65.02,30.48 C4.1 56.92,30.48 55.88,31.52 R19.1
N08457: length 69.6
  BOTTOM w0.3: U11.14 92.5,25.4 91.25,26.65 81.65,26.65 79.5,24.5 79.5,14.9 78.55,13.95 73.14,13.95 72.41,13.22 72.41,6.91 71.5,6 69.6,6 68.7,6.9 68.7,19.2 67.58,20.32 U10.4 R20.1 C4.2
N08473: length 20.4
  BOTTOM w0.3: R20.2 60.96,8.14 61.48,7.62 C5.2 67.29,7.62 67.8,8.13 67.8,14.73 67.29,15.24 U10.6 U10.5
N08528: length 34.4
  BOTTOM w0.3: R19.2 55.88,25.48 57.05,26.65 62.25,26.65 63.4,25.5 63.4,23.6 64.14,22.86 U10.3 70.04,22.86 71.12,21.78 C5.1
N08724: length 37
  BOTTOM w0.3: U12.15 108.54,27.94 107.1,26.5 107.1,12.7 105.85,11.45 100.31,11.45 98.5,13.26 98.5,16.2 96.92,17.78 U11.11
N08757: length 34
  BOTTOM w0.3: U11.10 96.26,15.24 97.3,14.2 97.3,11.92 98.33,10.89 106.79,10.89 108.2,12.3 108.2,24.3 109.3,25.4 U12.14
N08772: length 47.5
  BOTTOM w0.3: U11.4 88.44,22.86 89.4,21.9 89.4,11.9 90.96,10.34 107.54,10.34 109.3,12.1 109.3,22.1 110.06,22.86 U12.13
N08784: length 23.3
  BOTTOM w0.3: U11.3 83.5,25.4 81.1,23 81.1,13.9 79.9,12.7 U10.8
N08808: length 67
  BOTTOM w0.3: 75,25.4 U10.13 ; 75,25.4 78.9,25.4 80,26.5 80,28.3 80.89,29.19 90.95,29.19 93.46,26.69 97.61,26.69 98.6,25.7 98.6,18 100.11,16.49 105.09,16.49 106,17.4 106,24.79 105.39,25.4 U12.3 ; 75,25.4 76,26.4 76,34.7 75.14,35.56 R21.2
N08837: length 17.2
  BOTTOM w0.3: U9.4 112.52,46.05 113.27,45.3 117.37,45.3 118.85,46.78 118.85,47.95 120.14,49.24 U9.8
N08841: length 34.2
  BOTTOM w0.3: U9.10 116.87,56.73 120.89,56.73 121.95,55.67 121.95,44.81 121.95,44.35 120.95,43.35 120.95,41.13 120.85,41.02 120.85,38.75 121.92,37.68 U13.9
N09092: length 6.1
  BOTTOM w0.3: U10.10 72.41,19.03 72.41,21.61 U10.12
N09117: length 75.8
  BOTTOM w0.3: U10.11 74.91,19.07 74.91,16.49 U10.9 71.85,17.05 71.85,25.37 73.17,26.69 74.69,26.69 75.4,27.4 75.4,32.9 74.6,33.7 73,33.7 72.41,34.29 72.41,39.81 73.1,40.5 R22.2
N09203: length 11.3
  BOTTOM w0.3: R22.1 122.1,42.8 123.1,43.8 127.5,43.8 128.52,44.82 Q1.3
N09219: length 8.9
  BOTTOM w0.3: Q2.3 Q1.1

## Copper pours and planes (outline as drawn; the poured copper is in the pictures)
GND on BOTTOM (solid shape): outline of 1019 points within 0,0 160,100
(no net) on BOTTOM: 0,0 0,100 160,100 160,0 ; 113 cut-outs

## Text on the board
Ref Des/Silkscreen Bottom: KJY
PLACE_BOUND_TOP: FIGURE | SIZE | 3.175 | DRILL CHART: TOP to BOTTOM | ALL UNITS ARE IN MILLIMETERS | PLATED | NON-PLATED | QTY | 4
